# Altium PCB BMS.PcbDoc (part 2 of 2)
Units mil, origin at the board's own origin, x right, y up, seen from the top; angles counter-clockwise.
Board outline 4985 x 2480 mil, 2 copper layers (Top Layer, Bottom Layer); 157 components, 120 nets, 511 pads, 165 vias.
Unrouted connection lines stored in the file: 1.
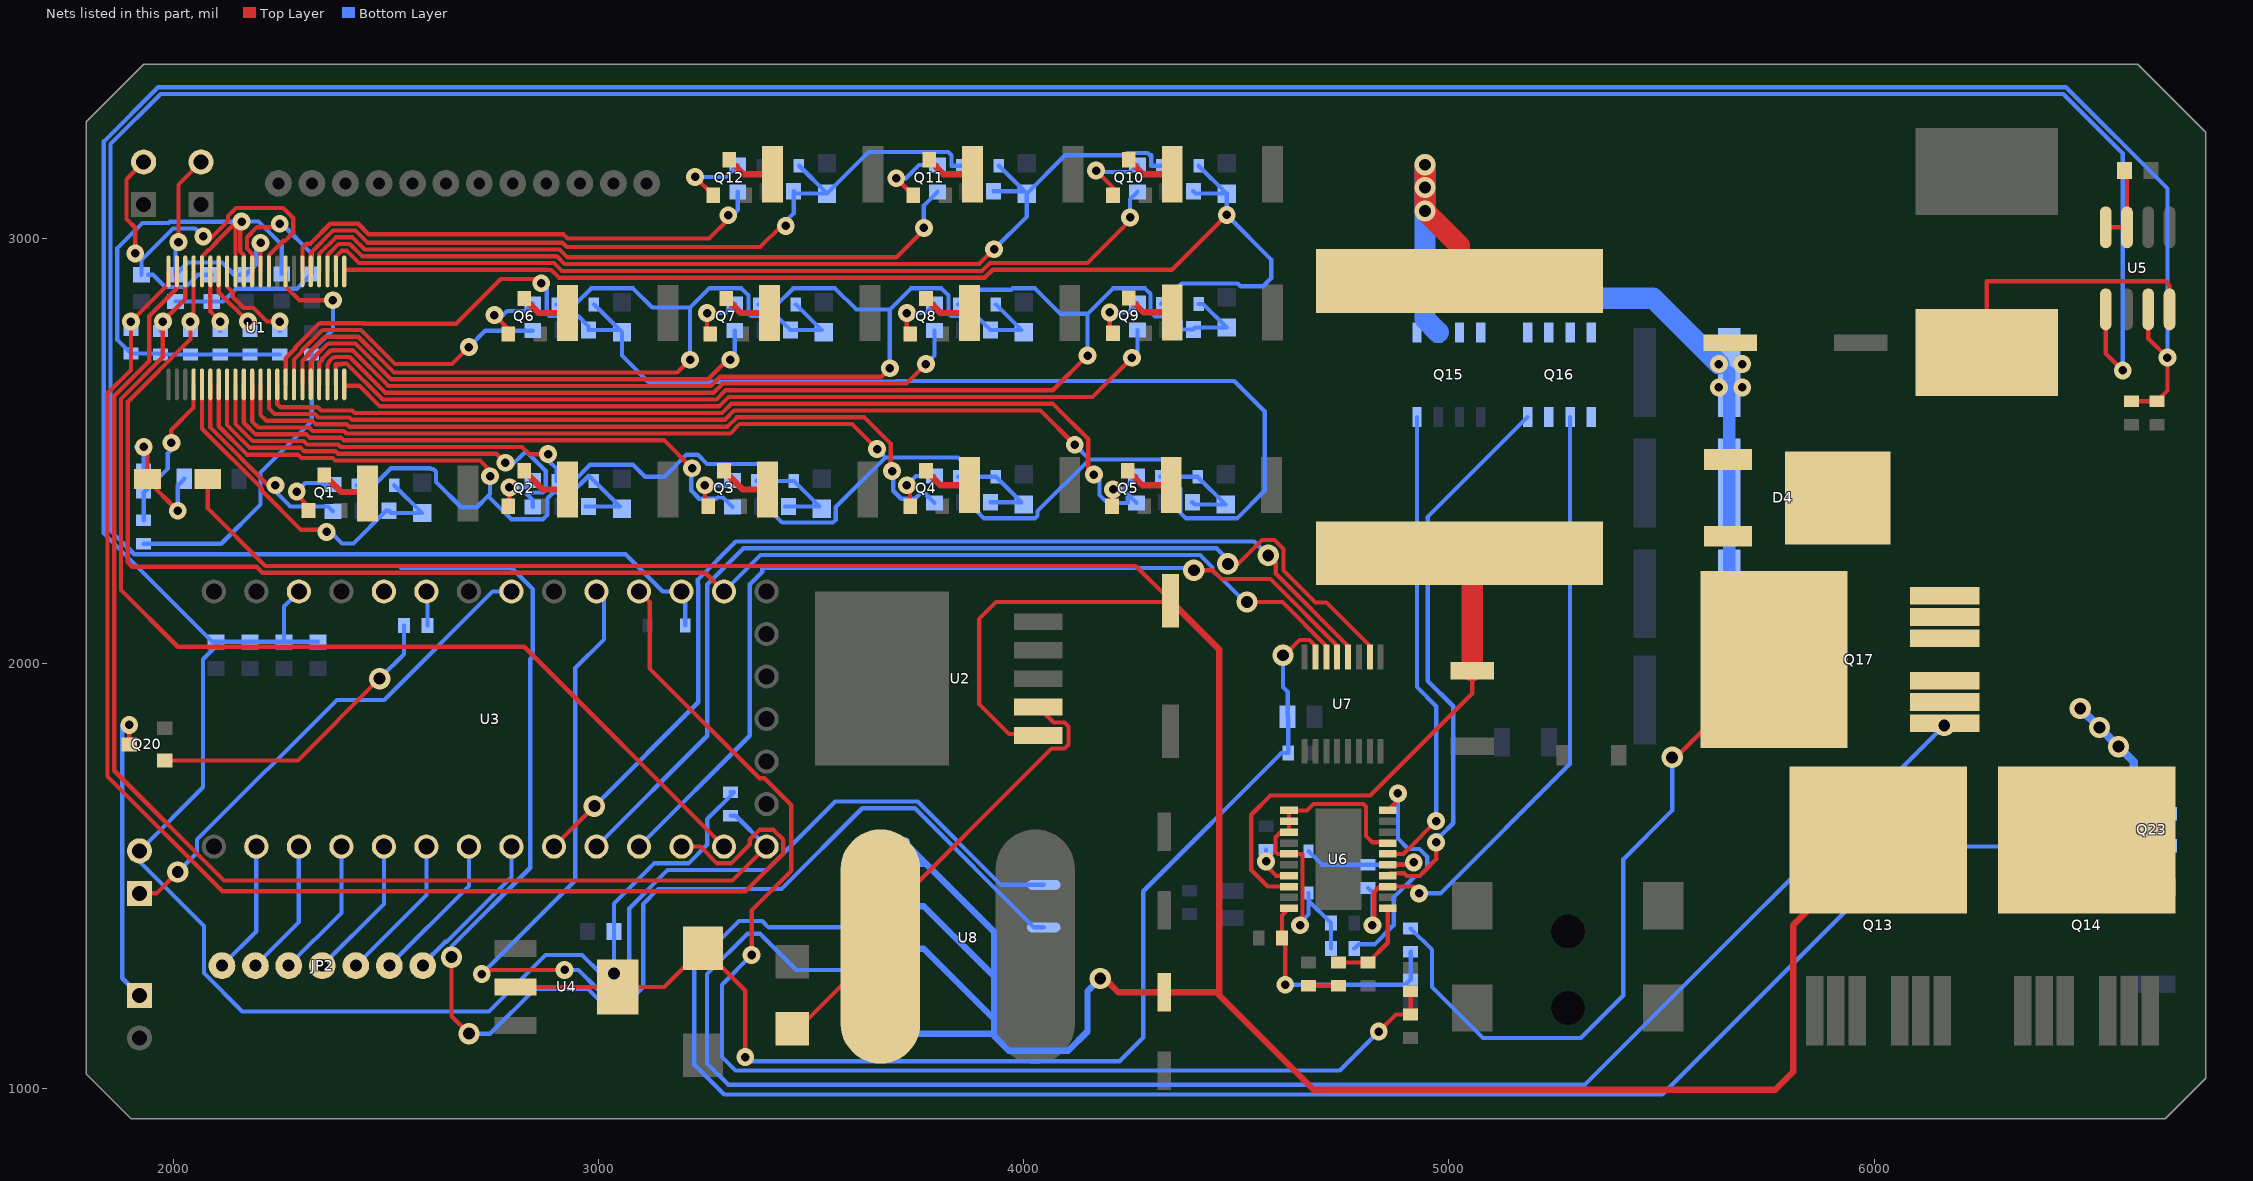
[diagram p2: the nets of this part, all layers, seen from the top]

## Via types
v1: diameter 42, hole 20, Top Layer to Bottom Layer, 106 vias
v2: diameter 50, hole 28, Top Layer to Bottom Layer, 59 vias

## Nets (pads, with @x,y where several pads share a name; then routed paths per layer and width w, separated by ;. In a path a pad name is that pad's centre, name@x,y a point inside that pad or via, vN(x,y) a via of type N, cw(c..) or ccw(c..) an arc to the next point about the centre after c; other vN are vias at no path point) (continued)
LOAD_SWITCH: U3.17/A3 U8.3 | length 2732.9
  Top Layer w10: v1(2725,1270) 2735,1280 v1(2920,1280)
  Bottom Layer w10: v1(2725,1270) 2945,1490 2945,1990 3012.44,2057.44 3012.44,2152.56 U3.17/A3@2995,2170 ; v1(2920,1280) 2952.33,1280 2996.79,1235.54 3050.94,1235.54 3071.97,1256.58 3071.97,1424.46 3162.2,1514.69 3395.42,1514.69 3556.63,1675.91 3750.76,1675.91 3946.67,1480 U8.3@4047.17,1480
NetC2_2: C2.2 R10.1 U1.4 | length 368.2
  Top Layer w10: v1(1995,2520) 1995,2550 2047.36,2602.36 U1.4@2047.36,2657.13
  Bottom Layer w10: C2.2@1930,2337.56 R10.1@1930,2402.44 1986.81,2459.25 1986.81,2494.92 1995,2503.11 v1(1995,2520)
NetC5_2: C5.2 R8.2 R9.2 U1.34 | length 674.6
  Top Layer w10: U1.34@2185.16,2922.87 2185.16,2964.48 2172.97,2976.66 2172.97,3003.09 2196.78,3026.91 2241.91,3026.91 v1(2250,3035)
  Bottom Layer w10: R8.2@2005,2852.01 R9.2@2090,2852.01 2117.18,2852.01 2147.29,2882.13 2290.63,2882.13 C5.2@2325,2916.5 2325,2964.88 2254.88,3035 v1(2250,3035)
NetC6_2: C6.2 D5.1 R14.1 U1.5 | length 862.9
  Top Layer w10: U1.5@2067.05,2657.13 2067.05,2552.95 2208.09,2411.91 2208.09,2406.78 2299.88,2315 2355,2315 v1(2360,2310)
  Bottom Layer w10: v1(2360,2310) 2369.88,2310 2396.78,2283.09 2423.22,2283.09 2500.12,2360 R14.1@2506.5,2360 2511.93,2354.57 2584.33,2354.57 D5.1@2518.9,2420
NetC7_2: C7.2 D5.2 D6.1 R16.1 U1.7 | length 1738
  Top Layer w10: U1.7@2106.42,2657.13 2106.42,2558.61 2173.12,2491.91 2293.22,2491.91 2301.03,2484.09 2374.44,2484.09 2380.3,2478.23 2720.86,2478.23 2744.62,2454.46 v1(2744.62,2441.19)
  Bottom Layer w10: D5.2@2431.1,2420 2471.95,2420 2511.91,2459.96 2604.01,2459.96 2605.98,2457.99 2611.17,2457.99 2617.56,2451.6 2617.56,2427.32 2676.78,2368.09 2713.49,2368.09 2740,2394.6 ; v1(2744.62,2441.19) 2744.62,2399.22 2740,2394.6 ; R16.1@2969.11,2370 R16.1@2976.5,2370 3049.57,2370 2989.57,2430 D6.1@2988.9,2430 2976.67,2442.23 2937.2,2402.76 2893.44,2402.76 2880,2389.32 2880,2350.68 2869.2,2339.88 2794.72,2339.88 2740,2394.6
NetC8_2: C8.2 D6.2 D7.1 R18.1 U1.9 | length 1727.4
  Top Layer w10: U1.9@2145.79,2657.13 2145.79,2564.23 2186.3,2523.72 2306.39,2523.72 2314.2,2515.91 2387.61,2515.91 2393.48,2510.04 2820.08,2510.04 2837.04,2493.08 v1(2881.37,2493.08)
  Bottom Layer w10: v1(2881.37,2493.08) 2881.37,2478.63 2901.1,2458.9 D6.2@2901.1,2430 2941.95,2430 2979.94,2467.99 3081.17,2467.99 3109.16,2440 3154.88,2440 3206.78,2491.91 3233.22,2491.91 3255.12,2470 3378.05,2470 3418.05,2430 D7.1@3458.9,2430 3459.57,2430 3519.57,2370 R18.1@3446.5,2370 R18.1@3439.11,2370
NetC9_2: C9.2 D7.2 D8.1 R20.1 U1.11 | length 2544.1
  Top Layer w10: U1.11@2185.16,2657.13 2185.16,2569.84 2199.47,2555.53 2319.57,2555.53 2327.38,2547.72 2400.79,2547.72 2406.66,2541.85 3309.89,2541.85 3331.71,2563.66 3596.34,2563.66 v1(3655,2505)
  Bottom Layer w10: D7.2@3379.11,2430 D7.2@3371.1,2430 3381.1,2440 3385.56,2440 3415,2410.56 3415,2348.67 3431.66,2332.01 3551.17,2332.01 3557.56,2338.4 3557.56,2368.16 3674.4,2485 ; v1(3655,2505) 3655,2504.4 3674.4,2485 ; R20.1@3921.5,2380 3994.57,2380 3934.57,2440 D8.1@3933.9,2440 3890.27,2440 3845.27,2485 3674.4,2485
NetC10_2: C10.2 D8.2 D9.1 R22.1 U1.13 | length 2945.2
  Top Layer w10: U1.13@2224.53,2657.13 2224.53,2600.47 2237.66,2587.34 2332.74,2587.34 2340.56,2579.53 2413.97,2579.53 2419.83,2573.66 3296.72,2573.66 3318.53,2595.47 4039.53,2595.47 v1(4120,2515)
  Bottom Layer w10: D8.2@3846.1,2440 3867.77,2440 3867.77,2423.56 3887.13,2404.2 3887.13,2361.55 3906.66,2342.01 4026.17,2342.01 4032.56,2348.4 4032.56,2359 4154.28,2480.72 ; v1(4120,2515) 4154.28,2480.72 ; R22.1@4396.5,2380 4401.93,2374.57 4474.33,2374.57 D9.1@4408.9,2440 4365.27,2440 4324.55,2480.72 4154.28,2480.72
NetC11_2: C11.2 D9.2 D10.1 R24.1 U1.15 | length 3255.6
  Top Layer w10: U1.15@2263.9,2657.13 2263.9,2718.51 2286.57,2741.18 2286.57,2744.1 2342.48,2800 2345.39,2800 2346.26,2800.87 2447.78,2800.87 2448.64,2800 2665,2800 2770,2905 2855,2905 v1(2865,2895)
  Bottom Layer w10: v1(2865,2895) 2877.8,2882.2 2877.8,2824.14 2884.18,2817.76 2952.24,2817.76 2976.5,2793.5 R24.1@2976.5,2785 3049.57,2785 2989.57,2845 D10.1@2988.9,2845 ; C11.2@3055,2779.57 3055,2725 3116.91,2663.09 3698.22,2663.09 3700.12,2665 4495,2665 4566.91,2593.09 4566.91,2407.74 4501.17,2342.01 4381.66,2342.01 4367.87,2355.8 4367.87,2412.13 4340.05,2439.95 4321.15,2439.95 D9.2@4321.1,2440
NetC12_2: C12.2 D10.2 D11.1 R26.1 U1.17 | length 1990.1
  Top Layer w10: U1.17@2303.27,2657.13 2303.27,2712.89 2318.39,2728.01 2318.39,2730.92 2355.66,2768.19 2358.57,2768.19 2359.43,2769.05 2434.6,2769.05 2518.66,2685 3185,2685 v1(3215,2715)
  Bottom Layer w10: D10.2@2901.1,2845 2944.73,2845 2982.73,2882.99 3081.17,2882.99 3126.17,2837.99 3215,2837.99 ; v1(3215,2715) 3215,2837.99 ; D11.1@3463.9,2845 3464.57,2845 3524.57,2785 R26.1@3451.5,2785 3418.74,2817.76 3359.18,2817.76 3352.8,2824.14 3352.8,2866.53 3336.33,2882.99 3260,2882.99 3215,2837.99
NetC13_2: C13.2 D11.2 D12.1 R28.1 U1.19 | length 2423.3
  Top Layer w10: U1.19@2342.64,2657.13 2342.64,2707.27 2350.2,2714.83 2350.2,2717.74 2368.83,2736.38 2371.74,2736.38 2372.61,2737.24 2421.42,2737.24 2505.48,2653.19 3263.78,2653.19 3285.59,2675 3665,2675 v1(3685,2695)
  Bottom Layer w10: D11.2@3376.1,2845 3419.73,2845 3457.73,2882.99 3556.17,2882.99 3606.17,2832.99 3685,2832.99 ; v1(3685,2695) 3685,2832.99 ; D12.1@3933.9,2845 3934.57,2845 3994.57,2785 R28.1@3921.5,2785 3888.74,2817.76 3829.18,2817.76 3822.8,2824.14 3822.8,2866.53 3806.33,2882.99 3735,2882.99 3685,2832.99
NetC14_2: C14.2 D12.2 D13.1 R30.1 U1.21 | length 2855.5
  Top Layer w10: U1.21@2382.01,2657.13 2382.01,2704.57 2394.27,2704.57 2395.14,2705.43 2408.25,2705.43 2492.3,2621.38 3276.95,2621.38 3298.76,2643.19 4068.19,2643.19 v1(4150,2725)
  Bottom Layer w10: D12.2@3846.1,2845 3880,2878.9 3880,2880 3970.84,2880 3973.83,2882.99 4026.17,2882.99 4086.17,2822.99 4150,2822.99 ; v1(4150,2725) 4150,2822.99 ; D13.1@4411.18,2846.42 4421.85,2846.42 C14.2@4477.28,2790.98 4403.35,2790.98 R30.1@4398.78,2786.42 4370,2786.42 4370,2805.03 4358.02,2817.01 4308.63,2817.01 4297.87,2827.77 4297.87,2870.15 4285.03,2882.99 4210,2882.99 4150,2822.99
NetC15_2: C15.2 D13.2 D14.1 R32.1 U1.23 | length 2850
  Top Layer w10: U1.23@2401.69,2922.87 2405.72,2926.91 2878.22,2926.91 2878.74,2926.38 2888.74,2926.38 2906.93,2908.19 3908.18,2908.19 3926.89,2926.91 4348.58,2926.91 v1(4477.28,3055.61)
  Bottom Layer w10: D13.2@4323.39,2846.42 4371.38,2894.41 4503.45,2894.41 4509.77,2888.09 4563.22,2888.09 4581.91,2906.78 4581.91,2950.98 v1(4477.28,3055.61) C15.2@4477.28,3105.98 ; R32.1@4398.78,3111.42 4404.21,3105.98 4476.61,3105.98 D14.1@4411.18,3171.42
NetC16_2: C16.2 D14.2 D15.1 R34.1 U1.25 | length 2354.7
  Top Layer w10: U1.25@2362.32,2922.87 2362.32,2960.86 2388.55,2987.09 2414.84,2987.09 2443.21,2958.72 2901.39,2958.72 2920.11,2940 3895,2940 v1(3930,2975)
  Bottom Layer w10: R34.1@3928.78,3111.42 4001.85,3111.42 3941.85,3171.42 D15.1@3941.18,3171.42 ; v1(3930,2975) 4007.28,3052.28 C16.2@4007.28,3105.98 4097.26,3195.96 4237.51,3195.96 4243.08,3201.54 4291.49,3201.54 4297.06,3195.96 4299.84,3195.96 4299.84,3171.42 D14.2@4323.39,3171.42
NetC17_2: C17.2 D15.2 D16.1 R36.1 U1.27 | length 1866.5
  Top Layer w10: U1.27@2322.95,2922.87 2322.95,2966.48 2375.37,3018.9 2428.01,3018.9 2456.38,2990.53 2914.57,2990.53 2925.1,2980 3380,2980 3430,3030 v1(3440,3030)
  Bottom Layer w10: v1(3440,3030) 3440,3040 3458.78,3058.78 R36.1@3458.78,3111.42 3464.21,3105.98 C17.2@3537.28,3105.98 ; D16.1@3471.18,3171.42 3471.85,3171.42 C17.2@3537.28,3105.98 ; D15.2@3853.39,3171.42 3829.84,3171.42 3829.84,3195.96 3822.3,3203.5 3634.8,3203.5 C17.2@3537.28,3105.98
NetC27_2: C27.2 U5.3 U5.4 | length 186.2
  Top Layer w10: U5.4@6545,3026.46 U5.3@6595,3026.46 6595,3153.5 C27.2@6588.5,3160
NetC28_1: C28.1 U6.7 | length 101
  Top Layer w10: v1(4570,1535) 4570,1525 4593.39,1501.61 U6.7@4623.86,1501.61
  Bottom Layer w10: v1(4570,1535) C28.1@4570,1562.44
NetC32_1: C32.1 L3.2 Q15.3 Q16.1 U6.13 | length 2303.6
  Top Layer w10: v1(4820,1385) 4824.57,1389.57 4824.57,1463.81 4836.78,1476.02 U6.13@4856.14,1476.02 4916.93,1476.02 4930,1462.95 v1(4930,1460)
  Top Layer w50: v2(4943.62,3173.62) v2(4943.62,3120) v2(4943.62,3064.8) 5025,2983.43 L3.2@5025,2900
  Bottom Layer w10: C32.1@4810,1472.44 4820,1462.44 v1(4820,1385) ; v1(4930,1460) 4980,1460 5285,1765 Q16.1@5285,2580.49
  Bottom Layer w50: v2(4943.62,3173.62) v2(4943.62,3120) 4943.62,3067.56 4945,3066.18 v2(4943.62,3064.8) 4943.62,2810.89 Q15.3@4975,2779.51
NetC32_2: C32.2 D3.1 U6.15 | length 330
  Top Layer w10: U6.15@4853.35,1530 U6.15@4856.14,1527.2 4911.96,1527.2 v1(4917.38,1532.62)
  Bottom Layer w10: D3.1@4670,1559.21 4701.65,1527.56 C32.2@4810,1527.56 4912.32,1527.56 v1(4917.38,1532.62)
NetC33_1: C33.1 C36.2 C40.2 C41.2 C42.2 D4.1 Q16.3 | length 1279.2
  Bottom Layer w30: C42.2@5659.41,1915 C41.2@5659.41,2165 C40.2@5659.41,2425 C36.2@5659.41,2685
  Bottom Layer w50: 5190,2860 5480,2860 v1(5635,2705)
  other v1: 5635,2650 5690,2650 5690,2705
NetC35_1: C35.1 R56.1 U6.11 | length 216.4
  Top Layer w10: R56.1@4740,1297.56 C35.1@4810,1297.56 4856.14,1343.7 U6.11@4856.14,1424.84
NetC38_2: C38.2 D3.2 R57.1 U6.1 U6.2 U6.3 U6.5 U6.17 | length 892.3
  Top Layer w10: v1(4650,1385) 4655.43,1390.43 4655.43,1552.8 U6.5@4623.86,1552.8 4597.33,1552.8 4592.28,1557.84 4592.28,1591.76 4604.5,1603.98 U6.3@4623.86,1603.98 U6.2@4623.86,1629.57 U6.1@4623.86,1655.16 4666.31,1655.16 4681.55,1670.39 4798.45,1670.39 4804.84,1664.01 4804.84,1595.16 4820,1580 4854.53,1580 U6.17@4856.14,1578.39
  Bottom Layer w10: v1(4650,1385) 4650,1390 4670,1410 4670,1442.44 ; D3.2@4670,1460.79 4670,1442.44 ; R57.1@4722.44,1330 C38.2@4722.44,1390 4670,1442.44
NetC39_1: C39.1 R56.2 | length 70
  Top Layer w10: C39.1@4670,1242.44 R56.2@4740,1242.44
NetD1_1: D1.1 L1.2 R10.2 | length 341.9
  Top Layer w10: v1(1930,2510) 1939.13,2500.87 L1.2@1939.13,2435 1939.13,2430.87 v1(2010,2360)
  Bottom Layer w10: R10.2@1930,2457.56 1930,2492.44 1912.44,2510 v1(1930,2510) ; v1(2010,2360) 2010,2419.37 D1.1@2025.63,2435
NetD2_1: D2.1 L2.1 U2.2 | length 1096.2
  Top Layer w10: D2.1@3455,1141.26 3469.17,1141.26 L2.1@3662.91,1335 3662.91,1397.91 4065.55,1800.55 4095.86,1800.55 4105,1809.7 4105,1852.59 4095.86,1861.73 4070.59,1861.73 U2.2@4034.25,1898.07
NetD4_1: D4.2 Q17.8 R55.2 | length 1641.8
  Top Layer w10: v2(5525,1780) 5534.49,1780 Q17.8@5764.49,2010
  Bottom Layer w10: R55.2@4910,1377.56 4960,1327.56 4960,1240 5080,1120 5310,1120 5410,1220 5410,1540 5525,1655 v2(5525,1780)
NetJP2_1: JP2.1 U3.6 | length 368.2
  Bottom Layer w10: JP2.1@2586.48,1290 2586.48,1293.16 2639.22,1345.91 2642.39,1345.91 2795,1498.52 U3.6@2795,1570
NetJP2_2: JP2.2 U3.5 | length 357.6
  Bottom Layer w10: JP2.2@2507.74,1290 2695,1477.26 U3.5@2695,1570
NetJP2_3: JP2.3 U3.4 | length 348.8
  Bottom Layer w10: JP2.3@2429,1290 2595,1456 U3.4@2595,1570
NetJP2_4: JP2.4 U3.3 | length 340.1
  Bottom Layer w10: JP2.4@2350,1290 2495,1435 U3.3@2495,1570
NetJP2_5: JP2.5 U3.2 | length 331.4
  Bottom Layer w10: JP2.5@2271,1290 2395,1414 U3.2@2395,1570
NetJP2_6: JP2.6 U3.1 | length 322.3
  Bottom Layer w10: JP2.6@2192.78,1290 2295,1392.22 U3.1@2295,1570
NetJP2_7: JP2.7 U3.0 | length 313.5
  Bottom Layer w10: JP2.7@2114.04,1290 2195,1370.96 U3.0@2195,1570
NetL3_1: L3.1 R52.1 U6.8 | length 1185.5
  Top Layer w10: U6.8@4623.86,1476.02 4573.98,1476.02 4535,1515 4535,1645 4580,1690 4815,1690 5055,1930 R52.1@5055,1983.58
  Top Layer w50: L3.1@5025,2230 5055,2200 R52.1@5055,1983.58
NetQ1_1: Q1.1 R15.2 | length 145
  Top Layer w10: v1@2290,2398.23 2319.11,2369.11 2319.11,2362.15 Q1.1@2317.6,2360.63
  Bottom Layer w10: v1(2290,2405) 2310,2425 2350,2425 2353.5,2421.5 R15.2@2375,2421.5
NetQ1_2: Q1.2 R38.2 | length 132.5
  Top Layer w15: Q1.2@2355,2454 Q1.2@2355,2444 2395,2404 2456.89,2404 R38.2@2456.89,2400
NetQ2_1: Q2.1 R17.2 | length 113.5
  Top Layer w10: Q2.1@2787.6,2370.63 2780,2378.23 2790,2388.23 v1(2790,2415)
  Bottom Layer w10: v1(2790,2415) 2828.5,2415 R17.2@2845,2431.5
NetQ2_2: Q2.2 R39.2 | length 120.1
  Top Layer w15: Q2.2@2825,2454 2869,2410 R39.2@2926.89,2410
NetQ3_1: Q3.1 R19.2 | length 122.3
  Top Layer w10: v1(3250,2420) 3250,2378.23 Q3.1@3257.6,2370.63
  Bottom Layer w10: v1(3250,2420) 3303.5,2420 R19.2@3315,2431.5
NetQ3_2: Q3.2 R40.2 | length 120.1
  Top Layer w15: Q3.2@3295,2454 3339,2410 R40.2@3396.89,2410
NetQ4_1: Q4.1 R21.2 | length 126.4
  Top Layer w10: v1(3725,2420) 3732.6,2412.4 Q4.1@3732.6,2370.63
  Bottom Layer w10: v1(3725,2420) 3746.5,2441.5 R21.2@3790,2441.5
NetQ4_2: Q4.2 R41.2 | length 116
  Top Layer w15: Q4.2@3770,2454 3804,2420 R41.2@3871.89,2420
NetQ5_1: Q5.1 R23.2 | length 114.7
  Top Layer w10: Q5.1@4207.6,2370.63 4200,2378.23 4210,2388.23 v1(4210,2410)
  Bottom Layer w10: v1(4210,2410) 4233.5,2410 R23.2@4265,2441.5
NetQ5_2: Q5.2 R42.2 | length 116
  Top Layer w15: Q5.2@4245,2454 4279,2420 R42.2@4346.89,2420
NetQ6_1: Q6.1 R25.2 | length 158.8
  Top Layer w10: v1(2755,2820) 2787.6,2787.4 Q6.1@2787.6,2775.63
  Bottom Layer w10: v1(2755,2820) 2775,2820 2785,2830 2828.5,2830 R25.2@2845,2846.5
NetQ6_2: Q6.2 R43.2 | length 116
  Top Layer w15: Q6.2@2825,2859 2859,2825 R43.2@2926.89,2825
NetQ7_1: Q7.1 R27.2 | length 126.4
  Top Layer w10: v1(3255,2825) 3255,2783.23 Q7.1@3262.6,2775.63
  Bottom Layer w10: v1(3255,2825) 3298.5,2825 R27.2@3320,2846.5
NetQ7_2: Q7.2 R44.2 | length 116
  Top Layer w15: Q7.2@3300,2859 3334,2825 R44.2@3401.89,2825
NetQ8_1: Q8.1 R29.2 | length 126.4
  Top Layer w10: v1(3725,2825) 3725,2783.23 Q8.1@3732.6,2775.63
  Bottom Layer w10: v1(3725,2825) 3768.5,2825 R29.2@3790,2846.5
NetQ8_2: Q8.2 R45.2 | length 116
  Top Layer w15: Q8.2@3770,2859 3804,2825 R45.2@3871.89,2825
NetQ9_1: Q9.1 R31.2 | length 126.4
  Top Layer w10: v1(4202.28,2826.42) 4202.28,2784.65 Q9.1@4209.88,2777.05
  Bottom Layer w10: v1(4202.28,2826.42) 4245.79,2826.42 R31.2@4267.28,2847.91
NetQ9_2: Q9.2 R46.2 | length 116
  Top Layer w15: Q9.2@4247.28,2860.42 4281.28,2826.42 R46.2@4349.17,2826.42
NetQ10_1: Q10.1 R33.2 | length 180.1
  Top Layer w10: v1(4170,3160) 4209.88,3120.12 Q10.1@4209.88,3102.05
  Bottom Layer w10: v1(4170,3160) 4173.58,3156.42 4250.79,3156.42 R33.2@4267.28,3172.91
NetQ10_2: Q10.2 R47.2 | length 116
  Top Layer w15: Q10.2@4247.28,3185.42 4281.28,3151.42 R47.2@4349.17,3151.42
NetQ11_1: Q11.1 R35.2 | length 166.5
  Top Layer w10: v1(3700,3141.93) Q11.1@3739.88,3102.05
  Bottom Layer w10: v1(3700,3141.93) 3722.8,3141.93 3753.78,3172.91 R35.2@3797.28,3172.91
NetQ11_2: Q11.2 R48.2 | length 116
  Top Layer w15: Q11.2@3777.28,3185.42 3811.28,3151.42 R48.2@3879.17,3151.42
NetQ12_1: Q12.1 R37.2 | length 172.7
  Top Layer w10: v1(3226.93,3145) Q12.1@3269.88,3102.05
  Bottom Layer w10: v1(3226.93,3145) 3299.37,3145 R37.2@3327.28,3172.91
NetQ12_2: Q12.2 R49.2 | length 116
  Top Layer w15: Q12.2@3307.28,3185.42 3341.28,3151.42 R49.2@3409.17,3151.42
NetQ15_1: Q15.2 U6.16 | length 1115
  Top Layer w10: U6.16@4856.14,1552.8 4892.43,1552.8 4904.16,1564.53 4904.65,1564.53 4970,1629.88 v1(4970,1630)
  Bottom Layer w10: Q15.2@4925,2580.49 4925,1945.12 4970,1900.12 v1(4970,1630)
NetQ16_1: Q16.2 U6.14 | length 1331.7
  Top Layer w10: U6.14@4856.14,1501.61 4861.97,1507.44 4894.35,1507.44 4901.08,1500.72 4930.59,1500.72 4941.78,1511.91 4970,1540.12 v1(4970,1580)
  Bottom Layer w10: v1(4970,1580) 4960,1590 4966.45,1596.45 4981.57,1596.45 5010,1624.88 5010,1900 4950,1960 4950,2345.49 Q16.2@5185,2580.49
NetQ17_2: Q17.1 U8.14 | length 4003.1
  Bottom Layer w10: U8.14@3692.83,1280 3465,1280 3380,1365 3350,1365 3255,1270 3255,1060 3305,1010 5320,1010 v2(6165,1855)
NetQ20_1: Q20.1 R63.2 | length 734.1
  Top Layer w10: Q20.1@1979.37,1772.6 2292.6,1772.6 v2(2485,1965)
  Bottom Layer w10: v2(2485,1965) 2542.44,2022.44 R63.2@2542.44,2090
NetQ23_3: Q23.3 R71.2 | length 118.3
  Bottom Layer w20: R71.2@6645,1474.17 6694.37,1523.54 Q23.3@6694.37,1572
NetR1_2: R1.2 U1.41 U3.14/A0 U7.14 | length 3749.6
  Top Layer w10: U1.41@2047.36,2922.87 2047.36,2812.36 v1(2040,2805) 2040,2763.68 1892.72,2616.4 1892.72,2238.51 1903.12,2228.11 2195.26,2228.11 2209.28,2214.09 3250.91,2214.09 U3.14/A0@3295,2170 ; v2(4525,2145) 4608.45,2145 4711.61,2041.83 U7.14@4711.61,2016
  Bottom Layer w10: U3.14/A0@3295,2170 3380.91,2255.91 4414.87,2255.91 4444.09,2226.68 4444.09,2220.13 4465.13,2199.09 4465.91,2199.09 4520,2145 v2(4525,2145)
NetR2_2: R2.2 U1.42 U3.11 | length 2504.7
  Top Layer w10: U1.42@2027.68,2922.87 2027.68,2857.68 v1(1975,2805) 1975,2721.18 1876.81,2622.99 1876.81,2173.19 2010,2040 2825,2040 U3.11@3295,1570
  Bottom Layer w10: R2.2@1970,2782.56 1975,2787.56 v1(1975,2805)
NetR3_2: R3.2 U1.44 U3.10 | length 3343.3
  Top Layer w10: U1.44@1988.31,2922.87 1988.31,2893.31 v1(1900,2805) 1900,2691.16 1845,2636.16 1845,1735 2115,1465 3345.73,1465 3435.36,1554.64 3434.41,1555.59 3434.41,1586.32 3411.32,1609.41 3378.68,1609.41 3355.59,1586.32 3355.59,1574.87 3311.32,1530.59 3278.68,1530.59 3239.27,1570 U3.10@3195,1570
  Bottom Layer w10: R3.2@1900,2785 v1(1900,2805)
NetR6_2: R6.2 U1.43 U3.12 | length 3024.7
  Top Layer w10: U1.43@2007.99,2922.87 2007.99,2883.11 1943.09,2818.22 1943.09,2711.76 1860.91,2629.57 1860.91,1748.37 2119.27,1490 3315,1490 U3.12@3395,1570
  Bottom Layer w10: R6.2@3310,1642.44 3322.56,1642.44 U3.12@3395,1570
NetR11_2: R11.2 U1.39 | length 150
  Top Layer w10: U1.39@2086.73,2922.87 2086.73,2828.27 v1(2110,2805)
  Bottom Layer w10: R11.2@2110,2782.56 v1(2110,2805)
NetR12_2: R12.2 U1.37 | length 222.4
  Top Layer w10: U1.37@2126.1,2922.87 2126.1,2887.7 2139.23,2874.57 2139.23,2863.26 2165.59,2836.91 2188.22,2836.91 2220.12,2805 v1(2250,2805)
  Bottom Layer w10: R12.2@2250,2782.56 v1(2250,2805)
NetR13_2: R13.2 U1.38 | length 173.7
  Top Layer w10: U1.38@2106.42,2922.87 2106.42,2873.58 v1(2175,2805)
  Bottom Layer w10: v1(2175,2805) 2180,2805 R13.2@2180,2782.56
NetR15_1: R15.1 U1.6 | length 480.1
  Top Layer w10: U1.6@2086.81,2657.13 2086.81,2555.72 2222.53,2420 v1(2240,2420)
  Bottom Layer w10: v1(2240,2420) 2240,2405 2275,2370 2363.5,2370 R15.1@2375,2358.5
NetR17_1: R17.1 U1.8 | length 1048.6
  Top Layer w10: U1.8@2126.1,2657.13 2126.1,2561.42 2179.71,2507.81 2299.8,2507.81 2307.61,2500 2381.03,2500 2386.89,2494.13 2759.43,2494.13 v1(2780.65,2472.91)
  Bottom Layer w10: v1(2780.65,2472.91) 2786.42,2472.91 2794.32,2465 2829.32,2500 2875.59,2453.73 2875.59,2409.26 2869.2,2402.87 2838.87,2402.87 2835.09,2399.09 2830.91,2399.09 2845,2385 R17.1@2845,2368.5
NetR19_1: R19.1 U1.10 | length 1358.3
  Top Layer w10: U1.10@2165.47,2657.13 2165.47,2567.03 2192.88,2539.62 2312.98,2539.62 2320.79,2531.81 2394.2,2531.81 2400.07,2525.95 3154.05,2525.95 v1(3220,2460)
  Bottom Layer w10: v1(3220,2460) 3218.09,2458.09 3218.09,2406.78 3236.78,2388.09 3276.28,2388.09 3279.41,2391.22 3292.28,2391.22 R19.1@3315,2368.5
NetR21_1: R21.1 U1.12 | length 1833.3
  Top Layer w10: U1.12@2204.84,2657.13 2204.84,2585.16 2218.57,2571.43 2326.16,2571.43 2333.97,2563.62 2407.38,2563.62 2413.25,2557.76 3303.31,2557.76 3325.12,2579.57 3625.55,2579.57 3686.91,2518.22 3686.91,2456.54 v1(3690.35,2453.09)
  Bottom Layer w10: v1(3690.35,2453.09) 3693.09,2450.35 3693.09,2406.78 3711.78,2388.09 3743.78,2388.09 3756.91,2401.22 3767.28,2401.22 R21.1@3790,2378.5
NetR23_1: R23.1 U1.14 | length 2272.3
  Top Layer w10: U1.14@2244.21,2657.13 2244.21,2610.79 2251.76,2603.24 2339.33,2603.24 2347.14,2595.43 2420.56,2595.43 2426.42,2589.57 3290.13,2589.57 3311.94,2611.38 4068.74,2611.38 4151.91,2528.22 4151.91,2458.09 v1(4165,2445)
  Bottom Layer w10: v1(4165,2445) 4178.09,2431.91 4178.09,2396.78 4196.78,2378.09 4244.75,2378.09 4244.75,2398.75 R23.1@4265,2378.5
NetR25_1: R25.1 U1.16 | length 716
  Top Layer w10: U1.16@2283.58,2657.13 2283.58,2715.7 2302.48,2734.59 2302.48,2737.51 2349.07,2784.09 2351.98,2784.09 2352.85,2784.96 2441.19,2784.96 2521.15,2705 2655,2705 v1(2695,2745)
  Bottom Layer w10: v1(2695,2745) 2733.5,2783.5 R25.1@2845,2783.5
NetR27_1: R27.1 U1.18 | length 1187.6
  Top Layer w10: U1.18@2322.95,2657.13 2322.95,2710.08 2334.29,2721.42 2334.29,2724.33 2362.24,2752.28 2365.16,2752.28 2366.02,2753.15 2428.01,2753.15 2512.07,2669.09 3257.19,2669.09 3303.09,2715 v1(3310,2715)
  Bottom Layer w10: v1(3310,2715) 3310,2718.09 3308.09,2720 3320,2731.91 R27.1@3320,2783.5
NetR29_1: R29.1 U1.20 | length 1613.4
  Top Layer w10: U1.20@2362.32,2657.13 2362.32,2704.46 2366.1,2708.24 2366.1,2711.16 2375.42,2720.47 2378.33,2720.47 2379.2,2721.34 2414.84,2721.34 2498.89,2637.28 3270.37,2637.28 3292.18,2659.09 3724.09,2659.09 v1(3770,2705)
  Bottom Layer w10: v1(3770,2705) 3790,2725 R29.1@3790,2783.5
NetR31_1: R31.1 U1.22 | length 1991.8
  Top Layer w10: U1.22@2401.69,2657.13 2404.72,2654.09 2437.09,2654.09 2485.72,2605.47 3283.54,2605.47 3305.35,2627.28 4161.73,2627.28 v1(4254.38,2719.93)
  Bottom Layer w10: v1(4254.38,2719.93) 4267.28,2732.83 R31.1@4267.28,2784.92
NetR33_1: R33.1 U1.24 | length 2051.6
  Top Layer w10: U1.24@2382.01,2922.87 2382.01,2958.05 2395.14,2971.18 2408.25,2971.18 2436.62,2942.81 2894.8,2942.81 2913.52,2924.09 3901.59,2924.09 3920.3,2942.81 4150,2942.81 4250,3042.81 v1(4250,3050)
  Bottom Layer w10: v1(4250,3050) 4250,3092.64 R33.1@4267.28,3109.92
NetR35_1: R35.1 U1.26 | length 1628.3
  Top Layer w10: U1.26@2342.64,2922.87 2342.64,2963.67 2381.96,3002.99 2421.42,3002.99 2449.79,2974.62 2907.98,2974.62 2926.7,2955.91 3700,2955.91 3765,3020.91 v1(3765,3025)
  Bottom Layer w10: v1(3765,3025) 3765,3077.64 R35.1@3797.28,3109.92
NetR37_1: R37.1 U1.28 | length 1193.8
  Top Layer w10: U1.28@2303.27,2922.87 2303.27,2978.64 2312.73,2988.09 2322.08,2988.09 2368.78,3034.8 2434.6,3034.8 2459.4,3010 2917.59,3010 2927.59,3000 3260,3000 3305,3045 v1(3305,3055)
  Bottom Layer w10: v1(3305,3055) 3315,3055 3327.28,3067.28 R37.1@3327.28,3109.92
NetR50_1: R50.1 R51.2 U3.16/A2 | length 3060.6
  Top Layer w10: U3.16/A2@3095,2170 3120,2145 3120,1989.27 3378.68,1730.59 3390.13,1730.59 3453.34,1667.39 3453.34,1513.34 3360,1420 v1(3360,1315) ; v1(4835,1135) 4875.12,1175.12 R51.2@4910,1175.12 R50.1@4910,1230
  Bottom Layer w10: v1(3360,1315) 3290,1245 3290,1075 3321.91,1043.09 4743.09,1043.09 v1(4835,1135)
NetR53_2: R53.2 R54.2 R55.1 U6.10 | length 554.8
  Top Layer w10: v1(4615,1245) 4615,1347.56 R53.2@4607.56,1355 4607.56,1408.54 U6.10@4623.86,1424.84
  Bottom Layer w10: v1(4615,1245) 4897.44,1245 R54.2@4910,1257.56 R55.1@4910,1322.44
NetR57_2: R57.2 U6.20 | length 557.6
  Top Layer w10: U6.20@4856.14,1655.16 4880,1679.02 v1(4880,1695)
  Bottom Layer w10: R57.2@4777.56,1330 4787.56,1340 4825,1340 4870,1385 4870,1450 4920.72,1500.72 4930.59,1500.72 4949.28,1519.41 4949.28,1545.84 4930.59,1564.53 4904.42,1564.53 4880,1588.95 v1(4880,1695)
NetR63_1: R63.1 U3.21/A7 | length 81.1
  Bottom Layer w10: U3.21/A7@2595,2170 2597.56,2167.44 R63.1@2597.56,2090
NetU3_7: U3.7 U7.12 | length 2453
  Top Layer w10: U3.7@2895,1570 v2(2990,1665) ; 4592.89,2237.11 4592.89,2211.74 4762.8,2041.83 U7.12@4762.8,2016
  Bottom Layer w10: v2(2990,1665) 3234.41,1909.41 3234.41,2186.32 3233.46,2187.27 3233.46,2198.46 3322.72,2287.72 4542.28,2287.72 v2(4575,2255)
NetU3_8: U3.8 U7.10 | length 2521.1
  Top Layer w10: v2(4480,2235) 4504.22,2235 4560.13,2290.91 4589.87,2290.91 4610.91,2269.87 4610.91,2219.09 4685.91,2144.09 4711.71,2144.09 4813.98,2041.83 U7.10@4813.98,2016
  Bottom Layer w10: U3.8@2995,1570 3255.59,1830.59 3255.59,2186.32 3341.08,2271.81 4453.19,2271.81 4480,2245 v2(4480,2235)
NetU3_9: U3.9 U7.13 | length 2231.1
  Top Layer w10: v2@4397.97,2220 v2(4400,2220) 4444.22,2220 4465.13,2199.09 4579.94,2199.09 4737.2,2041.83 U7.13@4737.2,2016
  Bottom Layer w10: U3.9@3095,1570 3355.59,1830.59 3355.59,2186.32 3385,2215.73 3385,2225 4395,2225 v2(4400,2220)
NTC1: C1.2 P1.2 R9.1 U1.32 | length 1060.6
  Top Layer w10: v1(1910,2965) 1910,3025.52 1889.57,3045.96 1889.57,3139.57 P1.2@1930,3180 ; v1@2076.5,2990 2128.22,3041.71 2128.22,3053.22 2146.91,3071.91 2258.22,3071.91 2281.91,3048.22 2281.91,3014.4 2262.25,2994.74 2258.41,2994.74 2224.53,2960.86 U1.32@2224.53,2922.87
  Bottom Layer w10: v1(1910,2965) 1925,2950 ; C1.2@1925,2915 1925,2930 1925,2950 ; C1.2@1940,2915 1952.18,2915 1980.8,2886.38 2029.2,2886.38 2057.82,2915 R9.1@2090,2915 ; v1(2070,3005) 2051.34,3023.66 1998.66,3023.66 1925,2950
NTC2: C3.2 P2.2 R8.1 U1.33 | length 645.4
  Top Layer w10: v1(2011.88,2991.76) 2011.88,3126.88 P2.2@2065,3180 ; U1.33@2204.84,2922.87 2204.84,2989.84 v1(2204.88,2989.88)
  Bottom Layer w10: v1(2011.88,2991.76) 2005,2984.88 R8.1@2005,2915 2033.62,2943.62 2114.2,2943.62 2142.82,2915 C3.2@2170,2915 2194.68,2939.69 2194.68,2990.32 2199.37,2995 2204.49,2989.88 v1(2204.88,2989.88)
POWER_LED: P4.1 Q20.2 | length 714.3
  Top Layer w10: Q20.2@1896,1810 v1(1896,1856)
  Bottom Layer w10: v1(1896,1856) 1881,1856 1879.57,1854.57 1879.57,1260.43 P4.1@1920,1220
POWER_SWITCH: P3.1 U3.19/A5 | length 1187.1
  Top Layer w10: P3.1@1920,1460 1960,1460 v2(2010,1510)
  Bottom Layer w10: v2(2010,1510) 2055.59,1555.59 2055.59,1586.32 2384.27,1915 2495.73,1915 2750.73,2170 U3.19/A5@2795,2170
PRECHARGE: Q23.1 U8.16 | length 4530.2
  Bottom Layer w10: U8.16@3692.83,1380 3400,1380 3385,1395 3330,1395 3225,1290 3225,1057.12 3295.37,986.75 5501.75,986.75 6085,1570 6630,1570 6694.37,1634.37 Q23.1@6694.37,1647.4
PRECHARGE_SWITCH: U3.22/A8 U8.5 | length 3299.4
  Top Layer w10: v2(2654.09,1310) 2654.09,1170.91 v2(2695,1130)
  Bottom Layer w10: 2535,2225 2795.73,2225 2845,2175.73 2845,2016.49 2839.09,2010.58 2839.09,1520.12 2654.09,1335.12 v2(2654.09,1310) ; v2(2695,1130) 2745,1130 2850,1235 2974.84,1235 3005.47,1204.37 3069.37,1204.37 3105,1240 3105,1435 3140,1470 3430,1470 3620,1660 3744.17,1660 4024.17,1380 U8.5@4047.17,1380
SENSE: D18.1 U3.15/A1 U5.5 | length 7904.4
  Top Layer w10: U5.5@6545,2833.54 6545,2730 v1(6585,2690)
  Bottom Layer w10: D18.1@3203.9,2090 3203.9,2161.1 U3.15/A1@3195,2170 3150.73,2170 3062.97,2257.76 1907.77,2257.76 1852.19,2313.33 1852.19,3222.19 1970,3340 6445,3340 6585,3200 v1(6585,2690)
V-: C2.1 R4.2 U1.30 | length 1020.8
  Top Layer w10: U1.30@2263.9,2920.07 2263.9,2887.7 2296.59,2855 v1(2375,2855)
  Bottom Layer w10: C2.1@1930,2282.44 2112.44,2282.44 2205,2375 2205,2450 2325,2570 R4.2@2325,2727.44 2325,2735.64 2375,2785.64 v1(2375,2855)
VCC: C20.1 C21.1 C22.2 C23.2 C24.2 C25.2 C26.2 C30.2 C31.2 C43.2 P3.2 R6.1 U3.3.3V U4.2 U5.7 U7.15 | length 12910.7
  Top Layer w10: U4.2@2804.92,1240 3035.79,1240 3036.06,1240.28 U4.2@3036.06,1249.02 ; v2(3036.06,1271.45) U4.2@3036.06,1249.02 ; U4.2@3040.43,1244.65 U4.2@3036.06,1249.02 ; U4.2@3045.08,1240 3154.21,1240 C21.1@3245.28,1331.06 3345,1231.34 v1(3345,1075) ; v2(4610,2020) 4613.01,2020 4648.92,2055.91 4671.95,2055.91 4686.02,2041.83 U7.15@4686.02,2016 ; C22.2@6605,2617.56 C43.2@6665,2617.56 6690,2642.56 v1(6690,2720) 6645,2765 U5.7@6645,2833.54
  Bottom Layer w10: U3.3.3V@2295,2170 2260,2135 C24.2@2260,2051.5 ; C23.2@2340,2051.5 C24.2@2260,2051.5 ; R6.1@3310,1697.56 3318.2,1697.56 3255.59,1634.95 3255.59,1574.87 3211.32,1530.59 3130.59,1530.59 3036.06,1436.06 v2(3036.06,1271.45) 3004.89,1271.45 2961.34,1315 2875,1315 2742.13,1182.13 2161.94,1182.13 2071.63,1272.44 2071.63,1383.37 1920,1535 P3.2@1920,1560 2069.41,1709.41 2069.41,2010.74 C26.2@2110.17,2051.5 ; v1(3345,1075) 3355,1065 4225,1065 4280.91,1120.91 4280.91,1465 4605.91,1790 C31.2@4622.09,1790 4622.09,1873.62 C30.2@4620.71,1875 4620.71,1934.29 4610,1945 v2(4610,2020) ; v1(6690,2720) 6690,3117.49 6451.59,3355.91 1963.41,3355.91 1836.28,3228.78 1836.28,2306.74 2091.53,2051.5 C26.2@2100,2051.5 C26.2@2110.17,2051.5 ; C26.2@2110.17,2051.5 C25.2@2180,2051.5 C24.2@2260,2051.5
VDD: C18.1 C44.1 L1.1 Q13.8 Q14.8 Q17.2 Q23.2 R7.1 U2.1 U5.8 U8.11 U8.15 U8.17 U8.19 U8.20 | length 9497.5
  Top Layer w10: L1.1@2080.87,2435 2080.87,2365 2215.87,2230 4263.54,2230 C18.1@4345,2148.54 ; U2.1@4034.25,1831.14 4030.39,1835 3965,1835 3895,1905 3895,2105 3935,2145 C18.1@4345,2145 ; R7.1@6265,2732.5 6265,2900 6685,2900 6695,2890 U5.8@6695,2833.54
  Top Layer w15: v2(4180,1260) 4190,1260 4222.48,1227.52 C44.1@4330,1227.52 4452.48,1227.52 4460,1220 ; C18.1@4345,2148.54 4460,2033.54 4460,1220 ; Q13.8@6010,1585.51 5810,1385.51 5810,1040 5767.81,997.82 4682.19,997.82 4460,1220
  Bottom Layer w15: U8.11@3692.83,1130 3930,1130 ; U8.15@3692.83,1330 3764.46,1330 3929.73,1164.73 ; U8.17@3692.83,1430 3765,1430 3927.5,1267.5 ; U8.19@3692.83,1530 3770,1530 ; U8.20@3692.83,1580 3720,1580 3770,1530 ; v2(4180,1260) 4150,1230 4150,1135 4105,1090 3965,1090 3930,1125 3930,1130 ; 3770,1530 3930,1370 3930,1130
  Bottom Layer w20: v2(6485,1895) v2(6530,1850) v2(6575,1805) 6611,1769 Q23.2@6611,1610
VREG: C4.2 R1.1 R2.1 R3.1 R11.1 R12.1 R13.1 U1.35 U1.36 U1.40 | length 1504.6
  Top Layer w10: U1.40@2067.05,2922.87 2067.05,2958.05 2082.09,2973.09 2083.22,2973.09 2101.91,2991.78 2101.91,2992.91 2149,3040 v1(2160.12,3040) 2157.07,3036.95 2157.07,2970.08 2165.47,2961.67 U1.35@2165.47,2922.87 ; U1.36@2145.79,2922.87 v1@2145.79,3025.67
  Bottom Layer w10: R12.1@2250,2727.44 R13.1@2180,2727.44 R11.1@2110,2727.44 R1.1@2040,2727.44 R2.1@1970,2727.44 1967.56,2729.88 R3.1@1900,2729.88 1868.09,2761.79 1868.09,2978.09 1926.91,3036.91 1989.41,3036.91 1992.07,3039.57 2160.55,3039.57 v1(2160.12,3040) 2199.88,3040 2255,2984.88 C4.2@2255,2916.5
pads on no net: JP3.1 U1.1 U1.2 U1.3 U3.3.3V1 U3.13 U3.20/A6 U3.23/A9 U3.AGND U3.PGM U3.RESET U3.VBAT U3.VIN U6.6 U7.1 U7.2 U7.3 U7.4 U7.9 U8.2 U8.4 U8.6 U8.8 U8.9 U8.12 U8.13

## Polygon pours and split planes (outlines as drawn)
GND on Top Layer "GND_L01_P000" (solid, remove dead copper, pour order 0): 1810,3270 1935,3395 6615,3395 6765,3245 6765,1030 6680,945 1905,945 1810,1040
GND on Bottom Layer "GND_L02_P006" (solid, remove dead copper, pour order 6): 1810,3270 1935,3395 6615,3395 6765,3245 6765,1030 6680,945 1905,945 1810,1040

## Keep-outs
Keep-Out Layer:
  the board outline again, w7.87

## Other copper
Top Layer:
  rectangle net C+: 5000,1130 5110,1490
  rectangle net NetC33_1: 5595,2270 5730,2780
  rectangle net NetC33_1: 5595,2270 5715,2505
  region net L+: 6725,1065 6725,1270 6380,1270 6380,1095 6320,1095 6320,1270 5890,1270 5890,1065 5935,1020 6680,1020
  region net VDD: 6085,1890 6085,2220 6255,2220 6255,1890
  region net GND: 5445,1065 5485,1025 5755,1025 5780,1050 5780,1315 5600,1495 5445,1495
  region net GND: 5335,3015 5190,3160 5190,3290 5620,3290 5680,3230 5680,3015
  region net VDD: 6085,1890 6085,2845 6445,2845 6445,2580 6715,2310 6715,1410 5800,1410 5800,1765 6200,1765 6260,1825 6260,1890
  region net C+: 5110,1130 5110,1825 5000,1825 5000,1690 5000,1130
  region net NetD4_1: 5790,2500 6040,2500 6040,2280 5940,2180 5940,1800 5590,1800 5590,2220 5730,2220 5790,2280
  region net B+: 5817.87,3290 6429.99,3290.01 6470,3250 6470,3015 5842.56,3015 cw(c6017.06,3229.12) 5744.1,3186.82
Bottom Layer:
  rectangle net NetC33_1: 5165,2750 5355,2885
  region net L+: 6580,1265 6710,1265 6710,1080 6695,1065 6595,1065 6580,1080
  region net NetC32_1: 4905,2750 4905,2810 5085,2810 5285,2610 5355,2610 5355,2550 5215,2550 5215,2615 5080,2750

## Silkscreen, mask and mechanical layers (free items; w line width, h text height)
Top Overlay:
  text "B+" at 5675,3275 h60
  text "B-" at 5060,3200 h60
  text "L-" at 5670,1455 h60
  text "L+" at 5795,985 h60
Bottom Overlay:
  text "BMS v1.0 - Raphael Chang" at 2895,3315 h40

## Text inside footprints (layer, text, board x,y; h text height)
JP3: Mechanical 82 "//kentro/work/Production/AOI Parts/Tyler/Breadboard power 5v/barreljack.bmp" at 5548,1580 h1.7 r90
U7: Top Overlay "*" at 4702.76,1834.13 h50 r90